# EAGLE board undershield-pro-mini-rev2 (EAGLE 7.3.0)
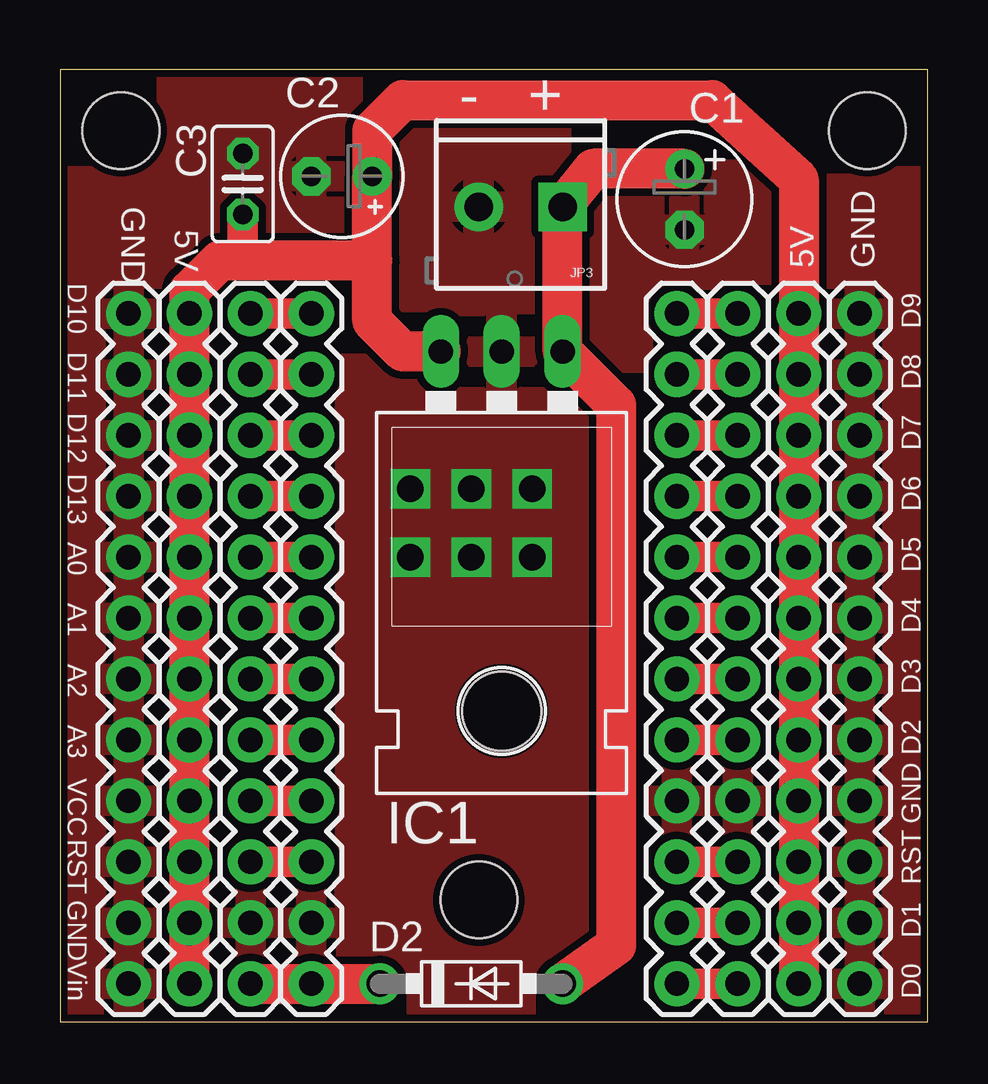
[diagram p0: board, top side]
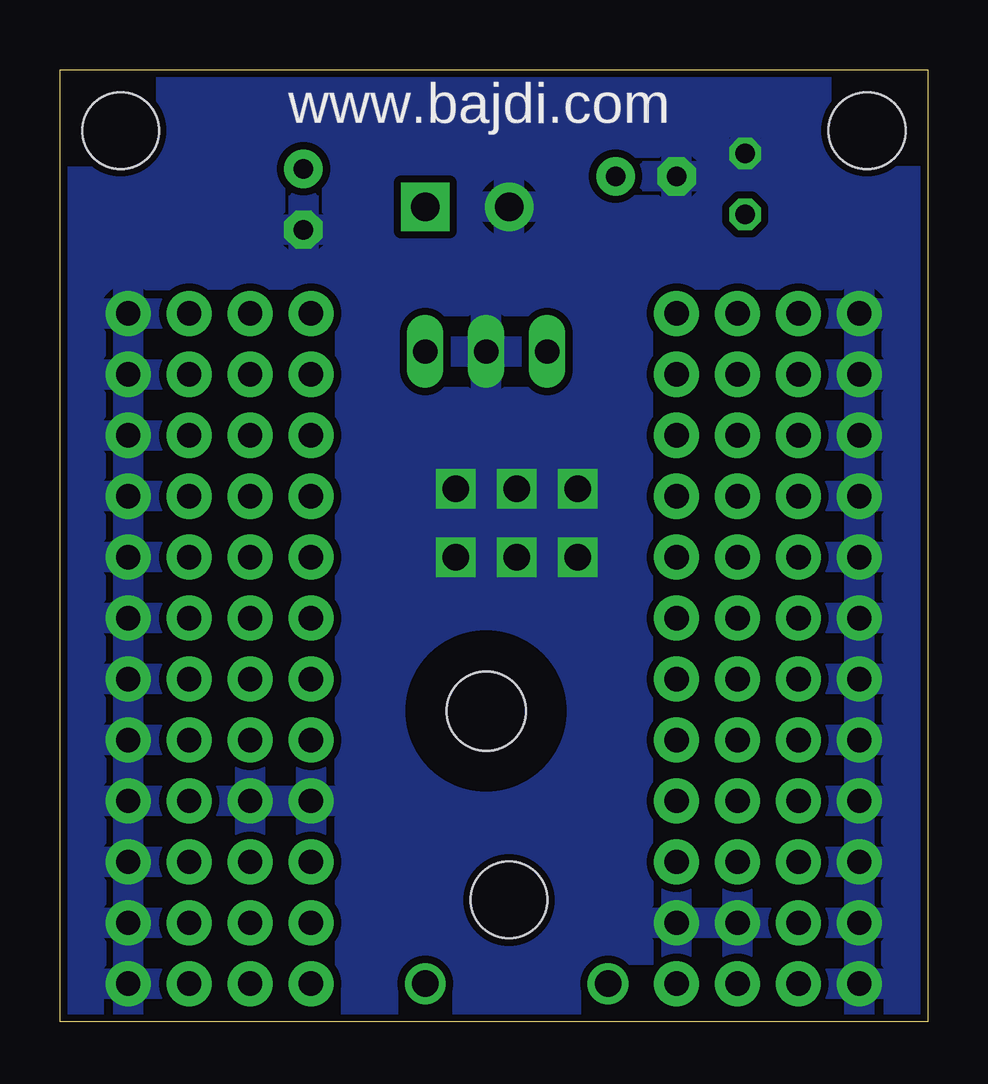
[diagram p1: board, bottom side, seen from below]

Size 36.18 x 39.68 mm. Coordinates in mm from the lower left corner, seen from the top.
Outline: 0,0 36.18,0 36.18,39.68 0,39.68 0,0
Copper layers (1*16): Top 0.035mm / dielectric 1.5mm / Bottom 0.035mm
Design rules "Fusion_eagle_rule_v1.1": minimum track width 6mil, minimum drill 12mil, track to track 6mil, track to pad 6mil, pad to pad 6mil, via to via 6mil, smd to smd 0mil, copper to edge 10mil, drill to drill 10mil, minimum pad ring 10mil, minimum via ring 6mil, stop-mask expansion 2mil, vias tented up to drill 100mil, thermal gap 10mil
Holes 3.2 mm at 2.54,37.15 33.66,37.15 17.46,5.08

## Footprints (pad centres in the part's own frame; a part is rotated, then mirrored left to right if it is on the bottom)
1X12 = drill 1.016 pad 1.88: 1 0,0; 2 2.54,0; 3 5.08,0; 4 7.62,0; 5 10.16,0; 6 12.7,0; 7 15.24,0; 8 17.78,0; 9 20.32,0; 10 22.86,0; 11 25.4,0; 12 27.94,0
E2,5-6 = drill 0.813 pad 1.6: + -1.27,0 | drill 0.813 pad 1.6 octagon: - 1.27,0
E2,5-5 = drill 0.813 pad 1.6: + -1.27,0 | drill 0.813 pad 1.6 octagon: - 1.27,0
C025-025X050 = drill 0.813 octagon: 1 -1.27,0; 2 1.27,0
DO41-7.6 = drill 1.1 pad 1.7: A 3.81,0; C -3.81,0
TO-220-ALT = drill 1.016 long: GND 0,-3.81; IN -2.54,-3.81; OUT 2.54,-3.81 | hole 3.302: 0,11.176
SCREWTERMINAL-3.5MM-2 = drill 1.2 pad 2.032 square: 1 0,0 | drill 1.2 pad 2.032: 2 3.5,0

## Placement (x,y rotation side)
.5V  M12PTH  [1X12]  30.8,1.59 90 top
.5V1  M12PTH  [1X12]  5.4,1.59 90 top
.GND  M12PTH  [1X12]  33.34,1.59 90 top
.GND1  M12PTH  [1X12]  2.86,1.59 90 top
C1  [E2,5-6]  26.03,34.29 270 top
C2  [E2,5-5]  11.75,35.24 180 top
C3  [C025-025X050]  7.62,34.93 90 top
D2  1N5817-B  [DO41-7.6]  17.14,1.59 0 top
IC1  [TO-220-ALT]  18.42,24.13 180 top
JP3  [SCREWTERMINAL-3.5MM-2]  20.95,33.97 180 top
JPLEFT  M12PTH  [1X12]  7.94,1.59 90 top
JPNANOL  M12PTH  [1X12]  10.48,1.59 90 top
JPNANOR  M12PTH  [1X12]  25.72,1.59 90 top
JPRIGHT  M12PTH  [1X12]  28.26,1.59 90 top

## Library data of the parts
.5V .5V1 .GND .GND1 JP3 JPLEFT JPNANOL JPNANOR JPRIGHT = SparkFun-Connectors
C1-C3 = rcl
D2 = diode
IC1 = SparkFun-PowerIC

## Nets
1: C1.+ D2.A IC1.IN JP3.1
5V: .5V1.1 .5V1.2 .5V1.3 .5V1.4 .5V1.5 .5V1.6 .5V1.7 .5V1.8 .5V1.9 .5V1.10 .5V1.11 .5V1.12 .5V.1 .5V.2 .5V.3 .5V.4 .5V.5 .5V.6 .5V.7 .5V.8 .5V.9 .5V.10 .5V.11 .5V.12 C2.+ C3.1 IC1.OUT
GND: .GND1.1 .GND1.2 .GND1.3 .GND1.4 .GND1.5 .GND1.6 .GND1.7 .GND1.8 .GND1.9 .GND1.10 .GND1.11 .GND1.12 .GND.1 .GND.2 .GND.3 .GND.4 .GND.5 .GND.6 .GND.7 .GND.8 .GND.9 .GND.10 .GND.11 .GND.12 C1.- C2.- C3.2 IC1.GND JP3.2 JPLEFT.2 JPNANOL.2 JPNANOR.4 JPRIGHT.4
N$3: JPNANOR.1 JPRIGHT.1
N$4: JPLEFT.12 JPNANOL.12
N$5: JPLEFT.4 JPNANOL.4
N$6: D2.C JPLEFT.1 JPNANOL.1
N$7: JPLEFT.3 JPNANOL.3
N$9: JPLEFT.5 JPNANOL.5
N$10: JPLEFT.6 JPNANOL.6
N$11: JPLEFT.7 JPNANOL.7
N$12: JPLEFT.8 JPNANOL.8
N$13: JPLEFT.9 JPNANOL.9
N$14: JPLEFT.10 JPNANOL.10
N$15: JPLEFT.11 JPNANOL.11
N$18: JPNANOR.2 JPRIGHT.2
N$19: JPNANOR.3 JPRIGHT.3
N$20: JPNANOR.5 JPRIGHT.5
N$21: JPNANOR.6 JPRIGHT.6
N$22: JPNANOR.7 JPRIGHT.7
N$23: JPNANOR.8 JPRIGHT.8
N$24: JPNANOR.9 JPRIGHT.9
N$25: JPNANOR.10 JPRIGHT.10
N$26: JPNANOR.11 JPRIGHT.11
N$27: JPNANOR.12 JPRIGHT.12

## Tracks (layer width: path | path; a pad name or v marks a point on that pad's centre or on a via)
1
  Top 1.676: D2.A 23.18,3.18 23.18,25.72 IC1.IN JP3.1 22.22,35.56 C1.+
5V
  Top 1.27: C3.1 7.62,31.75
  Top 1.676: .5V.1 .5V.2 .5V.3 .5V.4 .5V.5 .5V.6 .5V.7 .5V.8 .5V.9 .5V.10 .5V.11 .5V.12 30.8,35.12 27.18,38.42 14.29,38.42 13.02,37.15 C2.+ 13.02,31.75 | IC1.OUT 14.29,27.94 13.02,29.21 13.02,31.75 | .5V1.1 .5V1.2 .5V1.3 .5V1.4 .5V1.5 .5V1.6 .5V1.7 .5V1.8 .5V1.9 .5V1.10 .5V1.11 .5V1.12 5.4,30.48 6.67,31.75 7.62,31.75 13.02,31.75
GND  (via drill 1.1)
  other vias: 14.6,19.37 17.14,19.37 19.69,19.37 14.6,22.23 17.14,22.23 19.69,22.23
  pour Bottom (isolate 0.305): 0,39.69 35.88,39.69 35.88,0 0,0
  pour Top (isolate 0.305): 0,39.69 35.88,39.69 35.88,0 0,0
N$3
  Top 1.27: JPNANOR.1 JPRIGHT.1
N$4
  Top 1.27: JPNANOL.12 JPLEFT.12
N$5
  Top 1.27: JPNANOL.4 JPLEFT.4
N$6
  Top 1.676: JPLEFT.1 JPNANOL.1 D2.C
N$7
  Top 1.27: JPLEFT.3 JPNANOL.3
N$9
  Top 1.27: JPLEFT.5 JPNANOL.5
N$10
  Top 1.27: JPNANOL.6 JPLEFT.6
N$11
  Top 1.27: JPLEFT.7 JPNANOL.7
N$12
  Top 1.27: JPNANOL.8 JPLEFT.8
N$13
  Top 1.27: JPLEFT.9 JPNANOL.9
N$14
  Top 1.27: JPNANOL.10 JPLEFT.10
N$15
  Top 1.27: JPLEFT.11 JPNANOL.11
N$18
  Top 1.27: JPRIGHT.2 JPNANOR.2
N$19
  Top 1.27: JPNANOR.3 JPRIGHT.3
N$20
  Top 1.27: JPRIGHT.5 JPNANOR.5
N$21
  Top 1.27: JPNANOR.6 JPRIGHT.6
N$22
  Top 1.27: JPRIGHT.7 JPNANOR.7
N$23
  Top 1.27: JPNANOR.8 JPRIGHT.8
N$24
  Top 1.27: JPRIGHT.9 JPNANOR.9
N$25
  Top 1.27: JPNANOR.10 JPRIGHT.10
N$26
  Top 1.27: JPNANOR.11 JPRIGHT.11
N$27
  Top 1.27: JPRIGHT.12 JPNANOR.12

## Text on the board
tNames: - | + | GND | 5V | 5V | GND | D10 | D9 | D11 | D12 | D8 | D7 | D13 | D6 | A0 | D5 | A1 | D4 | A2 | D3 | A3 | D2 | VCC | RST | GND | RST | GND | D1 | Vin | D0
bNames: www.bajdi.com